# Altium PCB LEDA_Arcade Controller Touch sensor.pcbdoc
Units mil, origin at the board's own origin, x right, y up, seen from the top; angles counter-clockwise.
Board outline 4995 x 2191.1 mil, 2 copper layers (Top Layer, Bottom Layer); 48 components, 47 nets, 148 pads, 72 vias.
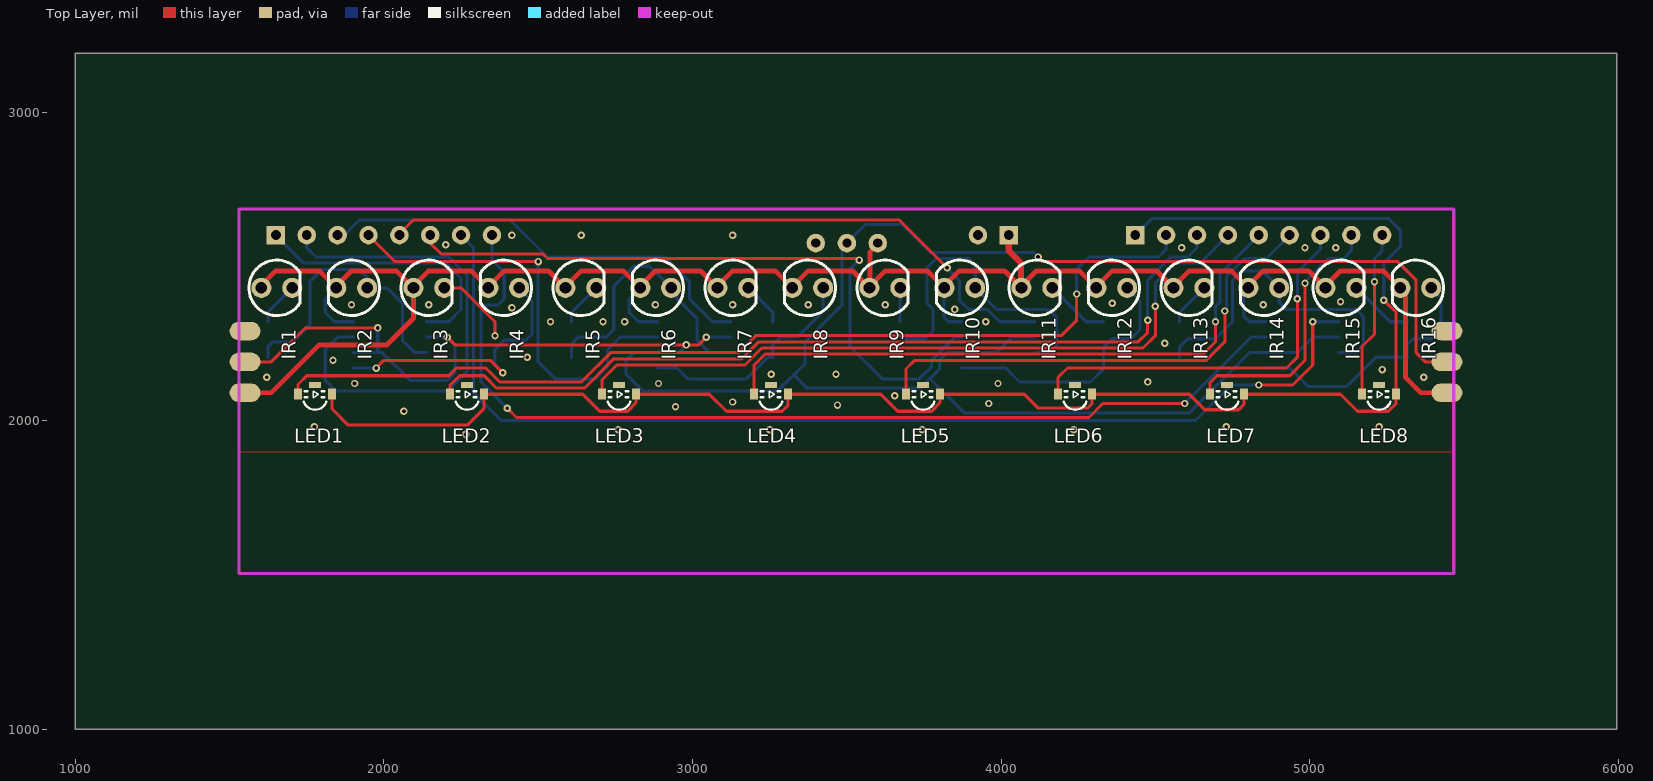
[diagram p0: Top Layer view]
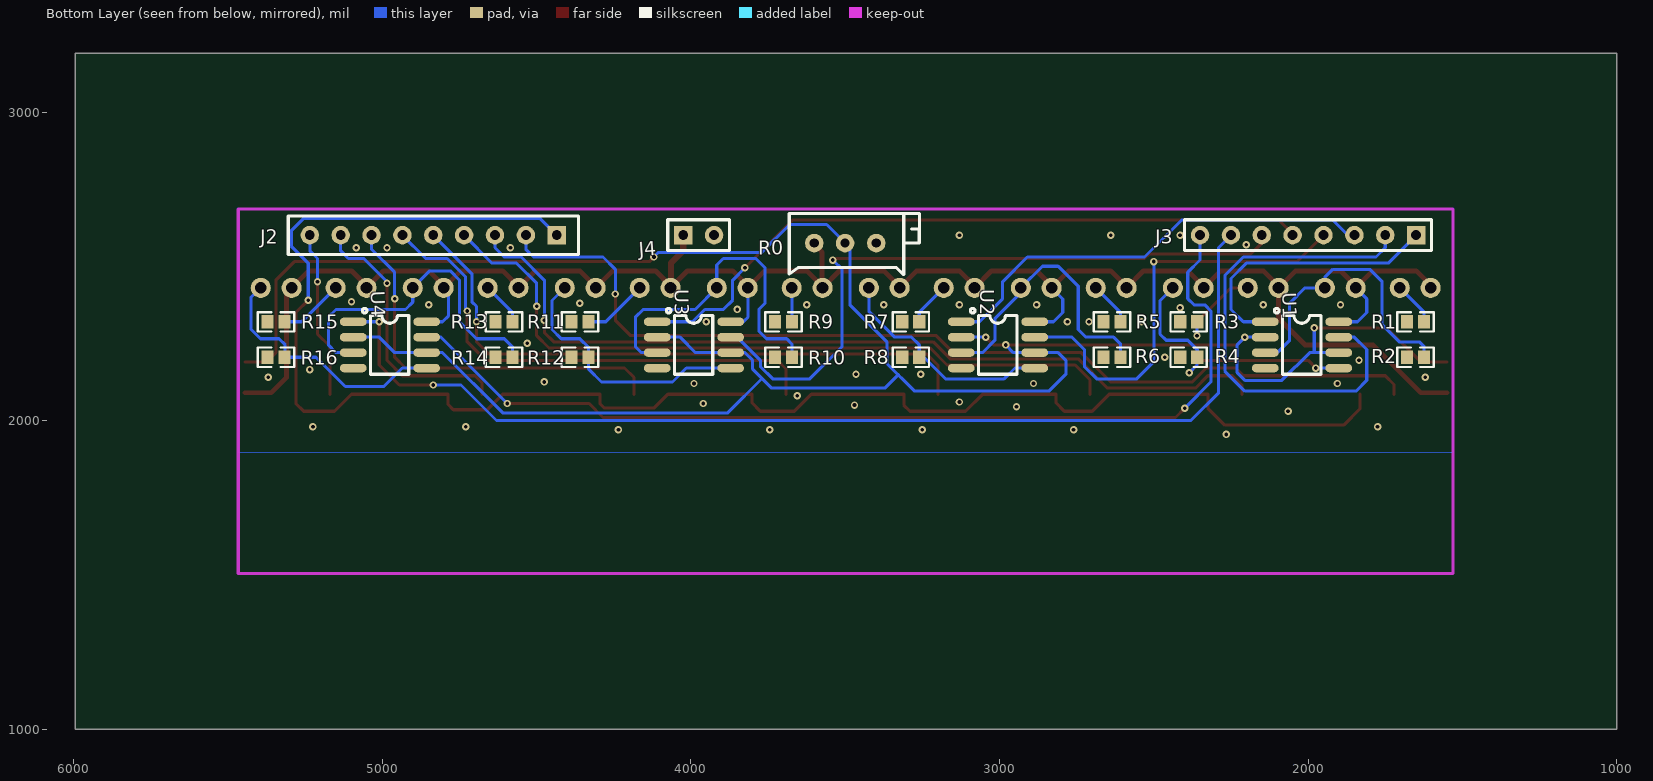
[diagram p1: Bottom Layer view, seen from below]

## Layer stack, top to bottom
Top Layer: signal copper (thickness not stored)
Dielectric: dielectric 12.6, FR-4, Dk 4.8
Bottom Layer: signal copper (thickness not stored)

## Board outline
5995,1000 1000,1000 1000,3191.1 5995,3191.1

## Components (designator, comment, footprint, x,y, rotation, side; value= is the part's Value field where it differs from the comment)
IR1 "3mm 40deg" DIODE_IR204-A-L 1653.03,2431.1 r90 top
IR2 "3mm 30deg" IR-3MM/2.54 1895.81,2431.1 r270 top
IR3 "3mm 40deg" DIODE_IR204-A-L 2145.63,2431.1 r90 top
IR4 "3mm 30deg" IR-3MM/2.54 2388.41,2431.1 r270 top
IR5 "3mm 40deg" DIODE_IR204-A-L 2638.23,2431.1 r90 top
IR6 "3mm 30deg" IR-3MM/2.54 2881.01,2431.1 r270 top
IR7 "3mm 40deg" DIODE_IR204-A-L 3130.82,2431.1 r90 top
IR8 "3mm 30deg" IR-3MM/2.54 3373.6,2431.1 r270 top
IR9 "3mm 40deg" DIODE_IR204-A-L 3623.41,2431.1 r90 top
IR10 "3mm 30deg" IR-3MM/2.54 3866.19,2431.1 r270 top
IR11 "3mm 40deg" DIODE_IR204-A-L 4116.01,2431.1 r90 top
IR12 "3mm 30deg" IR-3MM/2.54 4358.79,2431.1 r270 top
IR13 "3mm 40deg" DIODE_IR204-A-L 4608.61,2431.1 r90 top
IR14 "3mm 30deg" IR-3MM/2.54 4851.39,2431.1 r270 top
IR15 "3mm 40deg" DIODE_IR204-A-L 5101.2,2431.1 r90 top
IR16 "3mm 30deg" IR-3MM/2.54 5343.98,2431.1 r270 top
J2 "2.54 9P" 1X9_2.54MM_PTH 4835,2601.73 r180 bottom
J3 "2.54-8P" 2.54-1*8P_TIGHT_JX 2000,2601.73 r180 bottom
J4 "2.54-1*2" 2.54-1*2P_JX 3975,2601.73 r0 bottom
LED1 "E6C1204CWAY1UDA" LED-SMD_3P-L3.20-W1.50-R-RD 1776.85,2101.1 r180 top
LED2 "E6C1204CWAY1UDA" LED-SMD_3P-L3.20-W1.50-R-RD 2269.44,2101.1 r180 top
LED3 "E6C1204CWAY1UDA" LED-SMD_3P-L3.20-W1.50-R-RD 2762.04,2101.1 r180 top
LED4 "E6C1204CWAY1UDA" LED-SMD_3P-L3.20-W1.50-R-RD 3254.63,2101.1 r180 top
LED5 "E6C1204CWAY1UDA" LED-SMD_3P-L3.20-W1.50-R-RD 3747.22,2101.1 r180 top
LED6 "E6C1204CWAY1UDA" LED-SMD_3P-L3.20-W1.50-R-RD 4239.81,2101.1 r180 top
LED7 "E6C1204CWAY1UDA" LED-SMD_3P-L3.20-W1.50-R-RD 4732.41,2101.1 r180 top
LED8 "E6C1204CWAY1UDA" LED-SMD_3P-L3.20-W1.50-R-RD 5225,2101.1 r180 top
R0 "20K" RES-ADJ_3296X 3500,2576.1 r270 bottom
R1 "1k" 0603 1651.7,2321.1 r0 bottom
R2 "50k" 0603 1651.7,2206.1 r0 bottom
R3 "1k" 0603 2387,2321.1 r0 bottom
R4 "50k" 0603 2387,2206.1 r0 bottom
R5 "1k" 0603 2635.1,2321.1 r0 bottom
R6 "50k" 0603 2635.1,2206.1 r0 bottom
R7 "1k" 0603 3287.6,2321.1 r0 bottom
R8 "50k" 0603 3287.6,2206.1 r0 bottom
R9 "1k" 0603 3700,2321.1 r0 bottom
R10 "50k" 0603 3700,2206.1 r0 bottom
R11 "1k" 0603 4359.2,2321.1 r0 bottom
R12 "50k" 0603 4359.2,2206.1 r0 bottom
R13 "1k" 0603 4605.5,2321.1 r0 bottom
R14 "50k" 0603 4605.5,2206.1 r0 bottom
R15 "1k" 0603 5344.4,2321.1 r0 bottom
R16 "50k" 0603 5344.4,2206.1 r0 bottom
U1 "LM358" SOIC-8_8PIN-L5.00-W6.20-PITCH1.27-BL 2019.82,2246.1 r90 bottom
U2 "LM358" SOIC-8_8PIN-L5.00-W6.20-PITCH1.27-BL 3005,2246.1 r90 bottom
U3 "LM358" SOIC-8_8PIN-L5.00-W6.20-PITCH1.27-BL 3990.18,2246.1 r90 bottom
U4 "LM358" SOIC-8_8PIN-L5.00-W6.20-PITCH1.27-BL 4975.37,2246.1 r90 bottom

## Footprints (in the part's own frame and the unit in brackets; to place one, negate y for a bottom-side part, rotate by r counter-clockwise, add the part's x,y. Pads: shape width x height; smd on the part's side, far side on the other; paste and mask are expansions set on the pad)
1X9_2.54MM_PTH [mm]
  rect 1.52x1.52 hole 0.81: 1(10.16,0)
  round 1.52 hole 0.81: 2(7.62,0) 3(5.08,0) 4(2.54,0) 5(0,0) 6(-2.54,0) 7(-5.08,0) 8(-7.62,0) 9(-10.16,0)
  silkscreen extent -11.94,-1.59 11.94,1.59
2.54-1*2P_JX [mm]
  rect 1.52x1.52 hole 0.81: 1(1.27,0)
  round 1.52 hole 0.81: 2(-1.27,0)
  silkscreen extent -2.54,-1.27 2.54,1.27
2.54-1*8P_TIGHT_JX [mm]
  rect 1.52x1.52 hole 0.81: 1(8.89,0)
  round 1.52 hole 0.81: 2(6.35,0) 3(3.81,0) 4(1.267,0.003) 5(-1.273,0.003) 6(-3.813,0.003) 7(-6.353,0.003) 8(-8.893,0.003)
  silkscreen extent -10.16,-1.27 10.16,1.27
0603 [mm]
  rect 1x1.1 smd: 1(0.7,0) 2(-0.7,0)
  silkscreen extent -1.5,-0.8 1.5,0.8
DIODE_IR204-A-L [mil]
  round 65 hole 38: 1(0,-50) 2(0,50)
  silkscreen extent -90,-75 90,90
IR-3MM/2.54 [mil]
  round 65 hole 38: 1(0,50) 2(0,-50)
  silkscreen extent -90,-75 90,90
LED-SMD_3P-L3.20-W1.50-R-RD [mm]
  rect 0.65x0.9 smd: 1(1.4,0.375) 2(-1.4,0.375)
  rect 1x0.5 smd: 3(0,-0.375)
  silkscreen extent -0.94,0.12 0.94,1.65
RES-ADJ_3296X [mil]
  round 60 hole 30: 1(0,-100.39) 2(0,-0.39) 3(0,100.39)
  silkscreen extent -96,-181 102,240
SOIC-8_8PIN-L5.00-W6.20-PITCH1.27-BL [mm]
  oval 0.7x2.2 smd: 1(1.905,3.023) 2(0.635,3.023) 3(-0.635,3.023) 4(-1.905,3.023) 5(-1.905,-3.023) 6(-0.635,-3.023) 7(0.635,-3.023) 8(1.905,-3.023)
  silkscreen extent -2.41,-1.55 3.01,2.27

## Free pads (board coordinates)
  oval 100x60 smd: 1(1550,2091.1) 1(1550,2191.1) 1(1550,2291.1) 1(5445,2091.1) 1(5445,2191.1) 1(5445,2291.1)

## Via types
v1: diameter 24, hole 12, Top Layer to Bottom Layer, 72 vias

## Nets (pads, with @x,y where several pads share a name; then routed paths per layer and width w, separated by ;. In a path a pad name is that pad's centre, name@x,y a point inside that pad or via, vN(x,y) a via of type N, cw(c..) or ccw(c..) an arc to the next point about the centre after c; other vN are vias at no path point)
GND: J4.2 pad.1@1550,2291.1 pad.1@5445,2291.1 R0.3 R1.1 R2.1 R3.1 R4.1 R5.1 R6.1 R7.1 R8.1 R9.1 R10.1 R11.1 R12.1 R13.1 R14.1 R15.1 R16.1 U1.4 U2.4 U3.4 U4.4
  other v1: 2265,1956.1 2760,1971.1 3250,1971.1 3745,1971.1 4235,1971.1 1775,1981.1 4730,1981.1 5225,1981.1 2065,2031.1 2945,2046.1 3470,2051.1 3960,2056.1 3130,2061.1 3655,2081.1 1905,2121.1 2890,2121.1 3990,2121.1 4475,2126.1 1620,2141.1 5370,2141.1 3255,2151.1 3465,2151.1 5235,2166.1 1835,2196.1 2465,2206.1 4530,2251.1 2540,2321.1 2710,2321.1 2780,2321.1 3950,2321.1 3850,2361.1 2415,2366.1 1895,2376.1 2145,2376.1 2880,2376.1 3130,2376.1 3375,2376.1 3625,2376.1 4850,2376.1 4360,2381.1 5100,2386.1 4585,2561.1 4985,2561.1 5085,2561.1 2200,2571.1 2415,2601.1 2640,2601.1 3130,2601.1
IR1_1: IR1.1 R1.2 | length 142.7
  Bottom Layer w10: R1.2 1624.1,2352.2 IR1.1
IR7_1: IR7.1 R7.2 | length 142.8
  Bottom Layer w10: IR7.1 3260,2351.9 R7.2
IR11_1: IR11.1 R11.2 | length 211.2
  Bottom Layer w10: IR11.1 4276,2321.1 R11.2
IR15_1: IR15.1 R15.2 | length 211.2
  Bottom Layer w10: IR15.1 5261.2,2321.1 R15.2
J2_1: J2.1 LED1.2 LED2.2 LED3.2 LED4.2 LED5.2 LED6.2 LED7.2 LED8.2 | length 5424.7
  Top Layer w10: LED1.2 1831.97,2039.13 1885,1986.1 2270,1986.1 2325,2041.1 2324.56,2041.54 LED2.2 ; LED2.2 2644.8,2086.3 2700,2031.1 2790,2031.1 2817.2,2058.3 LED3.2 ; LED3.2 3054.77,2086.34 3110,2031.1 3290,2031.1 3310,2051.1 3309.75,2051.35 LED4.2 3609.76,2086.34 3665,2031.1 3775,2031.1 3802.34,2058.45 LED5.2 4074.77,2086.34 4120,2041.1 4280,2041.1 4295,2056.1 4294.93,2056.17 LED6.2 ; LED6.2 4609.8,2086.3 4660,2036.1 4770,2036.1 4787.5,2053.6 LED7.2 5099.8,2086.3 5155,2031.1 5255,2031.1 5280.1,2056.1 LED8.2 5280.1,2351 v1(5240,2391.1)
  Bottom Layer w10: J2.1 4489.4,2656.1 5255,2656.1 5295,2616.1 5295,2566.1 5240,2511.1 v1(5240,2391.1)
J2_2: J2.2 LED1.1 | length 3205.9
  Top Layer w10: LED1.1 1721.7,2117.8 1750,2146.1 2210,2146.1 2235,2171.1 2330,2171.1 2375,2126.1 2640,2126.1 2735,2221.1 3150,2221.1 3205,2276.1 4195,2276.1 4245,2326.1 v1(4245,2411.1)
  Bottom Layer w10: v1(4245,2411.1) 4245,2491.1 4285,2531.1 4510,2531.1 4535,2556.1 J2.2
J2_3: J2.3 LED2.1 | length 2807.8
  Top Layer w10: LED2.1 2214.3,2115.4 2245,2146.1 2325,2146.1 2365,2106.1 2650,2106.1 2745,2201.1 3160,2201.1 3215,2256.1 4445,2256.1 4475,2286.1 v1(4475,2326.1)
  Bottom Layer w10: v1(4475,2326.1) 4475,2456.1 4550,2531.1 4605,2531.1 4635,2561.1 J2.3
J2_4: J2.4 LED3.1 | length 2368.5
  Top Layer w10: LED3.1 2706.9,2133 2755,2181.1 3170,2181.1 3225,2236.1 4460,2236.1 4500,2276.1 v1(4500,2371.1)
  Bottom Layer w10: v1(4500,2371.1) 4500,2446.1 4565,2511.1 4644.38,2511.1 J2.4
J2_5: J2.5 LED4.1 | length 2024.7
  Top Layer w10: LED4.1 3199.5,2180.6 3235,2216.1 4655,2216.1 4695,2256.1 v1(4695,2321.1)
  Bottom Layer w10: v1(4695,2321.1) 4695,2371.1 4710,2386.1 4710,2476.7 J2.5
J2_6: J2.6 LED5.1 | length 1624.4
  Top Layer w10: LED5.1 3692.1,2168.21 3720,2196.1 4665,2196.1 4725,2256.1 v1(4725,2356.1)
  Bottom Layer w10: v1(4725,2356.1) 4730,2361.1 4730,2466.1 4790,2526.1 4859.4,2526.1 J2.6
J2_7: J2.7 LED6.1 | length 1283.5
  Top Layer w10: LED6.1 4184.69,2140.8 4215,2171.1 4925,2171.1 4960,2206.1 v1(4960,2396.1)
  Bottom Layer w10: v1(4960,2396.1) 4960,2481.1 5035,2556.1 J2.7
J2_8: J2.8 LED7.1 | length 871.9
  Top Layer w10: LED7.1 4677.28,2123.39 4700,2146.1 4935,2146.1 4985,2196.1 v1(4985,2446.1)
  Bottom Layer w10: v1(4985,2446.1) 4985,2451.1 5060,2526.1 5110,2526.1 5135,2551.1 J2.8
J2_9: J2.9 LED8.1 | length 542.4
  Top Layer w10: LED8.1 5169.88,2240.98 5210,2281.1 v1(5210,2451.1)
  Bottom Layer w10: v1(5210,2451.1) 5210,2526.1 5235,2551.1 J2.9
LED1_3: LED1.3
LED2_3: LED2.3
LED3_3: LED3.3
LED4_3: LED4.3
LED5_3: LED5.3
LED6_3: LED6.3
LED7_3: LED7.3
LED8_3: LED8.3
null: 
R3_2: IR3.1 R3.2 | length 300.2
  Top Layer w10: IR3.1 2250,2431.1 2360,2321.1 v1(2360,2276.1)
  Bottom Layer w10: R3.2 2360,2320.5 v1(2360,2276.1)
R5_2: IR5.1 R5.2 | length 143.4
  Bottom Layer w10: R5.2 2607.5,2350.4 2636.6,2379.5 IR5.1
R9_2: IR9.1 R9.2 | length 110.4
  Bottom Layer w10: R9.2 3672.4,2430.1 IR9.1
R13_2: IR13.1 R13.2 | length 143.4
  Bottom Layer w10: R13.2 4577.9,2350.4 IR13.1
S$67: 
S$69: 
SNS1: IR2.1 R2.2 U1.3 | length 936.9
  Bottom Layer w10: R2.2 1624.1,2240.2 1640,2256.1 1705,2256.1 1760,2311.1 1760,2451.1 1800,2491.1 1920,2491.1 1945.8,2465.3 IR2.1 2010,2431.1 2060,2381.1 2060,2261.1 2100,2221.1 U1.3
SNS1_OUT: J3.1 U1.1 | length 886.2
  Bottom Layer w10: J3.1 1740,2511.1 2200,2511.1 2250,2461.1 2250,2361.1 2210,2321.1 U1.1
SNS2: IR4.1 R4.2 U1.5 | length 904.7
  Top Layer w10: v1(1975,2171.1) 2000,2196.1 2345,2196.1 v1(2385,2156.1)
  Bottom Layer w10: U1.5 v1(1975,2171.1) ; v1(2385,2156.1) 2360,2181.1 R4.2 2359.4,2230.5 2390,2261.1 2460,2261.1 2480,2281.1 2480,2389.5 IR4.1
SNS2_OUT: J3.2 U1.7 | length 1616.7
  Bottom Layer w10: J3.2 1750,2561.1 1780,2531.1 2210,2531.1 2270,2471.1 2270,2161.1 2205,2096.1 1845,2096.1 1810,2131.1 1810,2231.1 1850,2271.1 U1.7
SNS3: IR6.1 R6.2 U2.3 | length 912
  Bottom Layer w10: R6.2 2607.5,2248.6 2630,2271.1 2720,2271.1 2745,2296.1 2745,2436.1 2810,2501.1 2861,2501.1 IR6.1 2931,2415.1 3015,2331.1 3015,2261.1 3055,2221.1 U2.3
SNS3_OUT: J3.3 U2.1 | length 1463.4
  Bottom Layer w10: J3.3 1870.6,2601.7 1920,2651.1 2410,2651.1 2530,2531.1 2910,2531.1 2990,2451.1 2990,2396.1 3065,2321.1 U2.1
SNS4: IR8.1 R8.2 U2.5 | length 742.5
  Bottom Layer w10: U2.5 2950,2171.1 2985,2136.1 3175,2136.1 3245,2206.1 R8.2 3260,2246.1 3285,2271.1 3340,2271.1 3423.6,2354.7 IR8.1
SNS4_OUT: J3.4 U2.7 | length 1407.3
  Top Layer w10: J3.4 2035.83,2516.1 v1(2500,2516.1)
  Bottom Layer w10: v1(2500,2516.1) 2500,2191.1 2555,2136.1 2685,2136.1 2725,2176.1 2725,2231.1 2765,2271.1 U2.7
SNS5: IR10.1 R10.2 U3.3 | length 1109.4
  Bottom Layer w10: R10.2 3672.4,2248.5 3690,2266.1 3755,2266.1 3780,2291.1 3780,2361.1 3760,2381.1 3760,2496.1 3790,2526.1 3895,2526.1 3916.2,2504.9 IR10.1 3986.2,2361.1 4155,2361.1 4180,2336.1 4180,2241.1 4160,2221.1 U3.3
SNS5_OUT: J3.5 U3.1 | length 2256.8
  Top Layer w10: J3.5 2050.1,2606.2 2095,2651.1 3670,2651.1 v1(3825,2496.1)
  Bottom Layer w10: v1(3825,2496.1) 3865,2456.1 3865,2391.1 3895,2361.1 3955,2361.1 3995,2321.1 U3.1
SNS6: IR12.1 R12.2 U3.5 | length 860.9
  Bottom Layer w10: U3.5 4015,2171.1 4060,2126.1 4290,2126.1 4331.6,2167.7 R12.2 4331.6,2237.7 4360,2266.1 4420,2266.1 4450,2296.1 4450,2389.9 IR12.1
SNS6_OUT: J3.6 U3.7 | length 2200.3
  Top Layer w10: J3.6@2150.1,2596.8 2150.1,2576 2185,2541.1 2515,2541.1 2530,2526.1 3530,2526.1 v1@3540,2516.1
  Bottom Layer w10: v1(3540,2521.1) 3510,2491.1 3510,2241.1 3615,2136.1 3735,2136.1 3775,2176.1 3775,2196.1 3850,2271.1 U3.7
SNS7: IR14.1 R14.2 U4.3 | length 1081.7
  Bottom Layer w10: R14.2 4577.9,2239 4605,2266.1 4695,2266.1 4750,2321.1 4750,2456.1 4780,2486.1 4846.4,2486.1 IR14.1 4901.4,2384.7 4925,2361.1 5150,2361.1 5175,2336.1 5175,2246.1 5150,2221.1 U4.3
SNS7_OUT: J3.7 U4.1 | length 3578.5
  Top Layer w10: v1@4840,2116.1 4945,2116.1 5010,2181.1 v1(5010,2321.1)
  Bottom Layer w10: J3.7 2290,2561.9 2290,2091.1 2380,2001.1 4630,2001.1 4745,2116.1 v1(4835,2116.1) ; v1(5010,2321.1) U4.1
SNS8: IR16.1 R16.2 U4.5 | length 844.5
  Bottom Layer w10: U4.5 4935,2171.1 4995,2111.1 5120,2111.1 5215,2206.1 R16.2 5315,2207.9 5315,2246.1 5335,2266.1 5395,2266.1 5425,2296.1 5425,2401.1 5395,2431.1 IR16.1
SNS8_OUT: J3.8 U4.7 | length 3240.6
  Top Layer w10: v1(2400,2041.1) 2430,2011.1 4285,2011.1 4330,2056.1 v1(4595,2056.1)
  Bottom Layer w10: J3.8 2350.1,2521 2390,2481.1 2390,2396.1 2370,2376.1 2335,2376.1 2315,2356.1 2315,2126.1 v1(2400,2041.1) ; v1(4595,2056.1) 4810,2271.1 U4.7
VCC: IR1.2 IR2.2 IR3.2 IR4.2 IR5.2 IR6.2 IR7.2 IR8.2 IR9.2 IR10.2 IR11.2 IR12.2 IR13.2 IR14.2 IR15.2 IR16.2 J4.1 pad.1@1550,2091.1 pad.1@5445,2091.1 R0.1 U1.8 U2.8 U3.8 U4.8 | length 6691.1
  Top Layer w16: pad.1@1550,2091.1 1635,2091.1 1790,2246.1 2010,2246.1 2095.6,2331.7 IR3.2 ; IR1.2 1603.03,2439.13 1650,2486.1 1790.81,2486.1 IR2.2 1845.81,2436.91 1895,2486.1 2040.63,2486.1 IR3.2 2095.63,2436.73 2145,2486.1 2283.41,2486.1 IR4.2 2338.41,2434.51 2390,2486.1 2533.23,2486.1 IR5.2 ; IR5.2 2588.2,2434.3 2640,2486.1 2752.5,2486.1 2776,2486.1 IR6.2 2831.01,2437.11 2880,2486.1 3025.82,2486.1 IR7.2 3080.82,2436.92 3130,2486.1 3268.6,2486.1 IR8.2 3323.6,2434.7 3375,2486.1 3518.41,2486.1 IR9.2 ; R0.1 3600.39,2571.5 3575,2546.1 3575,2432.69 IR9.2 ; pad.1@5445,2091.1 5360,2091.1 5310,2141.1 5310,2415.1 IR16.2 5238.98,2486.1 5100,2486.1 5051.2,2437.3 IR15.2 4996.2,2486.1 4850,2486.1 4801.39,2437.49 IR14.2 4746.39,2486.1 4610,2486.1 4558.61,2434.71 IR13.2 4503.61,2486.1 4360,2486.1 4308.79,2434.89 IR12.2 4253.79,2486.1 4115,2486.1 4066.01,2437.11 IR11.2 4011.01,2486.1 3865,2486.1 3816.19,2437.3 IR10.2 3761.19,2486.1 3625,2486.1 3573.41,2434.52 IR9.2
  Top Layer w20: J4.1 4025,2551.1 4065,2511.1 4065,2432.1 IR11.2
  Bottom Layer w10: IR2.2 1810,2395.3 1810,2351.1 1840,2321.1 U1.8 ; IR6.2 2795,2395.1 2795,2351.1 2825,2321.1 U2.8 ; IR10.2 3815,2429.9 3815,2336.1 3830,2321.1 U3.8 ; IR14.2 4785,2414.7 4785,2341.1 4805,2321.1 U4.8
VREF: pad.1@1550,2191.1 pad.1@5445,2191.1 R0.2 U1.2 U1.6 U2.2 U2.6 U3.2 U3.6 U4.2 U4.6 | length 8065.2
  Top Layer w10: pad.1@1550,2191.1 1635,2191.1 1745,2301.1 v1(1980,2301.1) ; v1(2205,2271.1) 2230,2246.1 v1(2980,2246.1) 3020,2246.1 v1(3045,2271.1) ; v1(4120,2531.1) 4135,2516.1 5285,2516.1 5345,2456.1 5345,2221.1 5375,2191.1 pad.1@5445,2191.1
  Bottom Layer w10: U1.6 1970,2221.1 1995,2221.1 2085,2131.1 2205,2131.1 2230,2156.1 2230,2246.1 v1(2205,2271.1) U1.2 ; 1980,2221.1 v1(1980,2301.1) ; U2.6@2891,2226.1 U2.6 ; v1(2980,2246.1) 2955,2221.1 U2.6 ; v1(3045,2271.1) U2.2 ; 3328.31,2149.42 3371.63,2106.1 3738.54,2106.1 ; 3738.5,2106.1 3800,2167.6 3800,2196.1 3825,2221.1 U3.6 3985,2221.1 4035,2271.1 U3.2 ; 3769.6,2137.2 3880.8,2026.1 4610,2026.1 4805,2221.1 U4.6 4960,2221.1 5010,2271.1 U4.2 ; v1(4120,2531.1) 4105,2546.1 3770,2546.1 3680,2636.1 3560.4,2636.1 R0.2 3485,2560.7 3485,2376.1 3365,2256.1 3365,2186.1 3275,2096.1 2840,2096.1 2785,2151.1 2785,2196.1 2810,2221.1 U2.6

## Polygon pours and split planes (outlines as drawn)
GND on Bottom Layer (solid): 1530,2686.1 5467.01,2686.1 5467.01,1898.7 1530,1898.7
GND on Top Layer (solid): 1530,2686.1 5467.01,2686.1 5467.01,1898.7 1530,1898.7

## Silkscreen, mask and mechanical layers (free items; w line width, h text height)
Document:
  lines w0.1: 3496.5,2094.55 3498.5,2096.55